# Altium PCB TLinePCB.PcbDoc
Units mil, origin at the board's own origin, x right, y up, seen from the top; angles counter-clockwise.
Board outline 6000 x 4000 mil, 2 copper layers (Top Layer, Bottom Layer); 23 components, 16 nets, 50 pads, 1 vias.
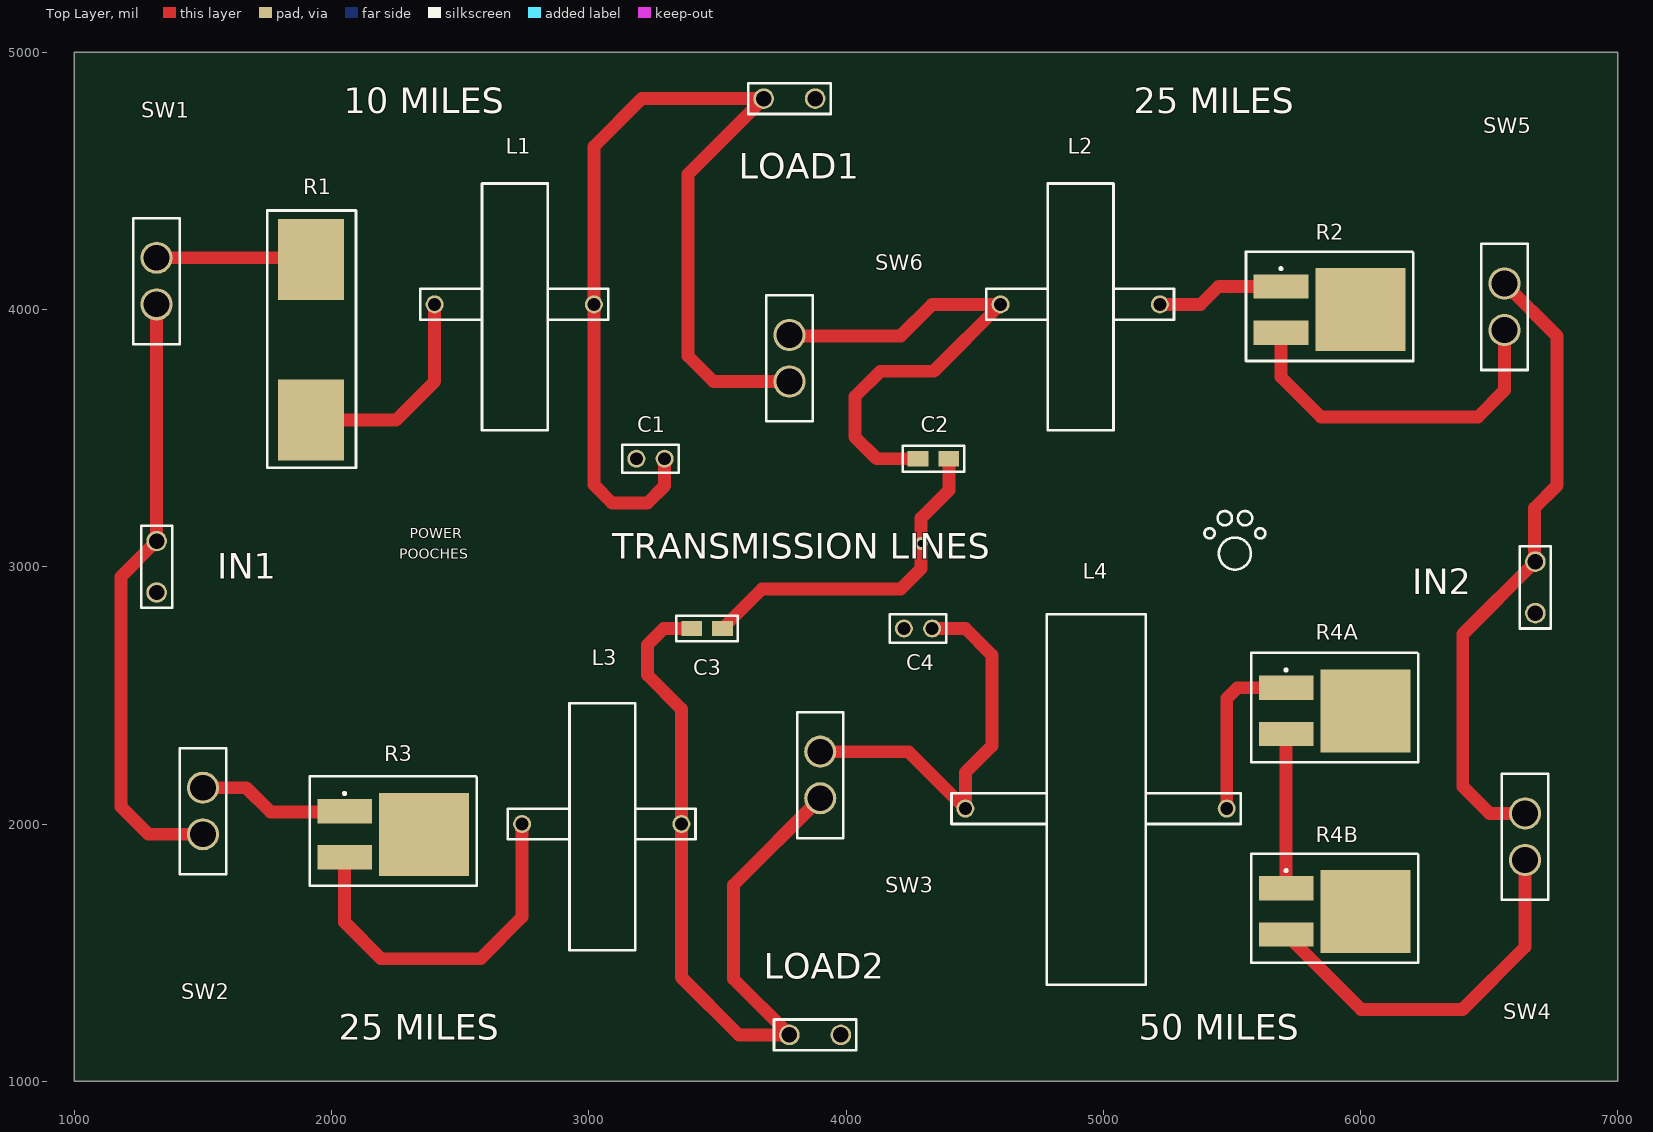
[diagram p0: Top Layer view]
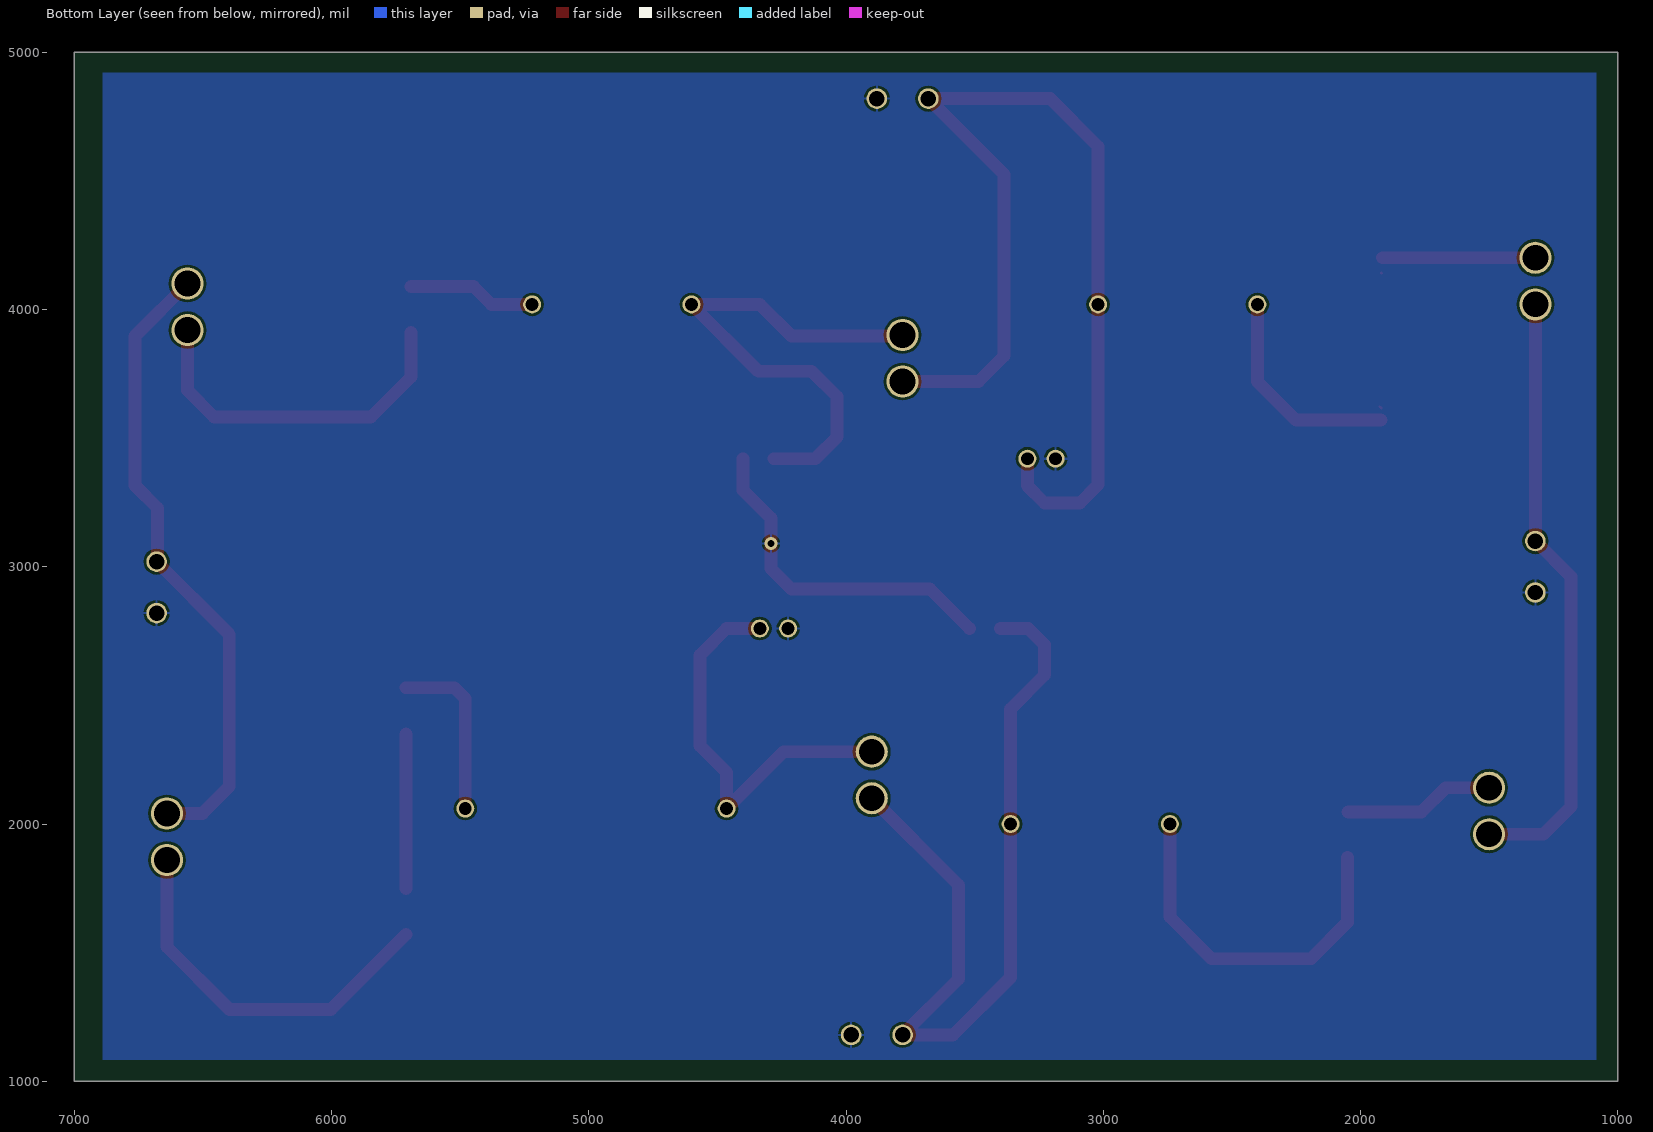
[diagram p1: Bottom Layer view, seen from below]

## Layer stack, top to bottom
Top Layer: signal copper 1.4
Dielectric: dielectric 12.6, FR-4, Dk 4.8
Bottom Layer: signal copper 1.4

## Board outline
1000,1000 7000,1000 7000,5000 1000,5000

## Design rules (kind name [scope] priority, off if disabled: settings)
Clearance [All] p1: gap=10
PolygonConnect [All] p1: connectstyle=Relief reliefconductorwidth=10 reliefentries=4 polygonreliefangle="90 Angle"
RoutingVias [All] p1: holewidth=28 width=50 viastyle="Through Hole" minholewidth=28 minwidth=50 maxholewidth=28 maxwidth=50
SilkscreenOverComponentPads [All] p1: minsilkscreentomaskgap=10
SolderMaskExpansion [All] p1: expansion=4
Width [All] p1: maxlimit=50 minlimit=10 preferedwidth=49 minimp=50.000000 maximp=50.000000 favimp=50.000000
27 further rules are at their usual default settings.

## Components (designator, comment, footprint, x,y, rotation, side; value= is the part's Value field where it differs from the comment)
C1 "Cap" CAPCAP 3240,3420 r0 top
C2 "Cap" CAPBIG 4340,3420 r0 top
C3 "Cap" CAPBIG 3460,2760 r0 top
C4 "Cap" CAPCAP 4280,2760 r0 top
IN1 "Header 2" TB 1320,2900 r0 top
IN2 "Header 2" TB 6680,2820 r0 top
L1 "Inductor" INDUCTOR1 2920,4020 r90 top
L2 "Inductor" INDUCTOR1 5120,4020 r90 top
L3 "Inductor" INDUCTOR1 3260,2000 r90 top
L4 "Inductor" INDUCTOR4 5280,2060 r90 top
LOAD1 "Header 2" CAPHORIZ 3800,4860 r0 top
LOAD2 "Header 2" CAPHORIZ 3900,1220 r0 top
R1 "Res1" RESISTOR1 1920,3880 r270 top
R2 "Res3" RESISTOR3 5880,4000 r0 top
R3 "Res3" RESISTOR3 2240,1960 r0 top
R4A "Res3" RESISTOR3 5900,2440 r0 top
R4B "Res3" RESISTOR3 5900,1660 r0 top
SW1 "SW-SPST" SWITCH 1320,4020 r90 top
SW2 "SW-SPST" SWITCH 1500,1960 r90 top
SW3 "SW-SPST" SWITCH 3900,2100 r90 top
SW4 "SW-SPST" SWITCH 6640,1860 r90 top
SW5 "SW-SPST" SWITCH 6560,3920 r90 top
SW6 "SW-SPST" SWITCH 3780,3720 r90 top

## Footprints (in the part's own frame and the unit in brackets; to place one, negate y for a bottom-side part, rotate by r counter-clockwise, add the part's x,y. Pads: shape width x height; smd on the part's side, far side on the other; paste and mask are expansions set on the pad)
CAPBIG [mil] "Molded Capacitor, 2-Leads, Body 4.5x5.5mm, IPC Medium Density"
  rect 80x60 smd: 1(60,0) 2(-60,0)
  silkscreen extent -120,-50 120,50
CAPCAP [mil] "Molded Capacitor, 2-Leads, Body 4.5x5.5mm, IPC Medium Density"
  round 70 hole 50: 1(-55,0) 2(55,0)
  silkscreen extent -110,-55 110,55
CAPHORIZ [mil] "SOT23, 3-Leads, Body 3.0x2.6mm (max), Pitch 0.95mm, IPC Medium Density"
  round 80 hole 60: 1(-120,-40) 2(80,-40)
  silkscreen extent -180,-100 140,20
INDUCTOR1 [mil]
  round 70 hole 50: 1(0,519.1) 2(0,-100)
  silkscreen extent -490,-155 470,575
INDUCTOR4 [mil]
  round 70 hole 50: 1(0,815.95) 2(0,-200)
  silkscreen extent -685,-255 755,870
RESISTOR1 [mm]
  rect 8x6.55 smd: 1(-8.001,0) 2(7.874,0)
  silkscreen extent -12.83,-4.32 12.57,4.45
RESISTOR3 [mm]
  rect 5.4x2.4 smd: 1(-4.8,2.28) 2(-4.8,-2.28)
  rect 8.9x8.2 smd: ""(3.05,0)
  silkscreen extent -8.25,-5.08 8.25,5.71
SWITCH [mil]
  round 125 hole 100: 1(0,0) 2(181.1,0)
  silkscreen extent -155,-90 335,90
TB [mil]
  round 80 hole 60: 1(0,200) 2(0,0)
  silkscreen extent -60,-60 60,260

## Part data
C1 C2 C3 C4: "Capacitor"
IN1 IN2 LOAD1 LOAD2: "Header, 2-Pin"
R1 R2 R3 R4A R4B: "Resistor"
SW1 SW2 SW3 SW4 SW5 SW6: "Single-Pole, Single-Throw Switch"

## Via types
v1: diameter 50, hole 28, Top Layer to Bottom Layer, 1 vias

## Nets (pads, with @x,y where several pads share a name; then routed paths per layer and width w, separated by ;. In a path a pad name is that pad's centre, name@x,y a point inside that pad or via, vN(x,y) a via of type N, cw(c..) or ccw(c..) an arc to the next point about the centre after c; other vN are vias at no path point)
GND: C1.1 C2.1 C3.1 C4.1 IN1.2 IN2.2 LOAD1.2 LOAD2.2 | length 1340.4
  Top Layer w50: C3.1 3673.39,2913.39 4212.6,2913.39 4291.34,2992.13 v1(4291.34,3090.55) 4291.34,3188.98 4400,3297.64 C2.1
NetC1_2: C1.2 L1.2 LOAD1.1 SW6.1 | length 4047.8
  Top Layer w50: C1.2 3295,3314.68 3228.35,3248.03 3090.55,3248.03 3020,3318.58 L1.2 3020,4634.17 3205.83,4820 LOAD1.1 3385.83,4525.83 3385.83,3818.9 3484.72,3720 SW6.1
NetC2_2: C2.2 L2.1 SW6.2 | length 2023.8
  Top Layer w10: SW6.2 SW6.2@3783.46,3897.64
  Top Layer w50: SW6.2@3783.46,3897.64 4212.6,3897.64 4334.96,4020 L2.1 4340.74,3759.84 4133.86,3759.84 4035.43,3661.42 4035.43,3503.94 4119.37,3420 C2.2
NetC3_2: C3.2 L3.2 LOAD2.1 SW3.1 | length 3207
  Top Layer w50: C3.2 3291.5,2760 3228.35,2696.85 3228.35,2578.74 3360,2447.09 L3.2 3360,1403.78 3583.78,1180 LOAD2.1 ; LOAD2.1@3780,1180.63 3562.99,1397.64 3562.99,1762.99 SW3.1
NetC4_2: C4.2 L4.1 SW3.2 | length 1570.1
  Top Layer w50: SW3.2 4242.95,2281.1 L4.1 4464.05,2200.27 4566.93,2303.15 4566.93,2657.48 4464.41,2760 C4.2
NetIN1_1: IN1.1 SW1.1 SW2.1 | length 2373.8
  Top Layer w50: SW1.1 IN1.1 1181.1,2961.1 1181.1,2066.93 1288.03,1960 SW2.1
NetIN2_1: IN2.1 SW4.2 SW5.2 | length 2474.9
  Top Layer w50: SW5.2 6763.46,3897.64 6763.46,3315.28 6676.54,3228.35 IN2.1@6676.54,3023.46 ; SW4.2 6502.2,2041.1 6397.64,2145.67 6397.64,2737.64 IN2.1
NetL1_1: L1.1 R1.2 | length 850
  Top Layer w10: R1.2@1920,3617.2 R1.2@1924.84,3622.05
  Top Layer w50: R1.2 2251.1,3570 2400.9,3719.8 L1.1
NetL2_2: L2.2 R2.1 | length 499.9
  Top Layer w50: L2.2 5378.27,4020 5448.03,4089.76 R2.1
NetL3_1: L3.1 R3.2 | length 1429.4
  Top Layer w50: R3.2 2051.02,1617.95 2192.6,1476.38 2578.74,1476.38 2740.9,1638.54 L3.1
NetL4_2: L4.2 R4A.1 | length 676.2
  Top Layer w50: L4.2 5480,2487.87 5521.89,2529.76 R4A.1
NetR1_1: R1.1 SW1.2 | length 604.9
  Top Layer w10: R1.1@1913.9,4201.1 R1.1 ; R1.1@1918.31,4141.1 R1.1@1920,4142.8
  Top Layer w50: SW1.2 R1.1@1913.9,4201.1
NetR2_2: R2.2 SW5.1 | length 1382.3
  Top Layer w50: R2.2 5691.02,3738.11 5846.46,3582.68 6456.69,3582.68 6560,3685.98 SW5.1
NetR3_1: R3.1 SW2.2 | length 587.4
  Top Layer w50: SW2.2 1668.66,2141.1 1762.52,2047.24 R3.1@2048.5,2047.24
NetR4A_2: R4A.2 R4B.1 | length 600.5
  Top Layer w50: R4B.1 R4A.2
NetR4B_2: R4B.2 SW4.1 | length 1509.8
  Top Layer w10: R4B.2 R4B.2@5732.91,1570.24
  Top Layer w50: R4B.2 6001.73,1279.53 6397.64,1279.53 6640,1521.89 SW4.1
pads on no net: R2. R3. R4A. R4B.

## Polygon pours and split planes (outlines as drawn)
GND on Bottom Layer "GND" (solid): 1082.68,4921.26 1082.68,1082.68 6889.76,1082.68 6889.76,4921.26

## Silkscreen, mask and mechanical layers (free items; w line width, h text height)
Top Overlay:
  circle w10: c5511.81,3051.18 r62.25
  circle w10: c5413.39,3129.92 r19.69
  circle w10: c5472.44,3188.98 r27.84
  circle w10: c5551.18,3188.98 r27.84
  circle w10: c5610.24,3129.92 r19.69
  text "10 MILES" at 2047.24,4763.78 h100
  text "25 MILES" at 5118.11,4763.78 h100
  text "POWER" at 2303.15,3110.24 h40
  text "POOCHES" at 2263.78,3031.5 h40
  text "TRANSMISSION LINES" at 3090.55,3031.5 h100
  text "25 MILES" at 2027.56,1161.42 h100
  text "50 MILES" at 5137.8,1161.42 h100
Mechanical 1:
  lines w10: 1082.68,1082.68 6889.76,1082.68 6889.76,4921.26 1082.68,4921.26 1082.68,1082.68